# EAGLE board usbl (EAGLE 5.11)
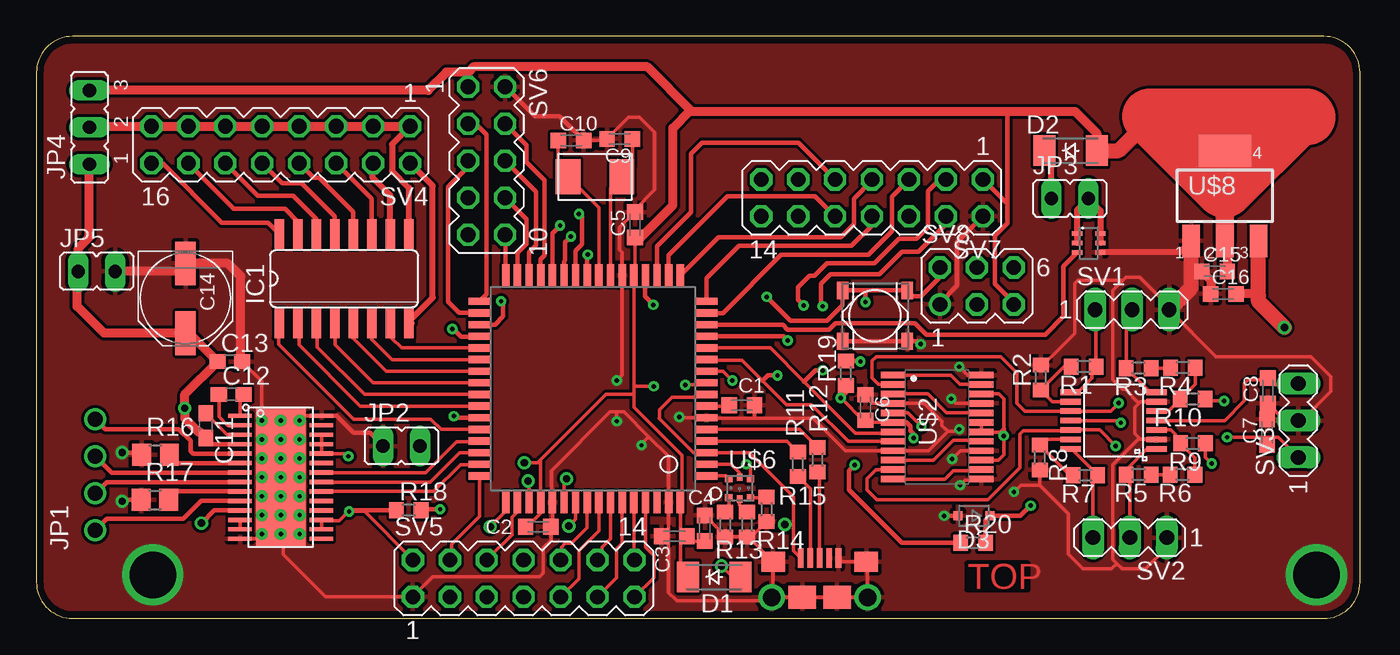
[diagram p0: board, top side]
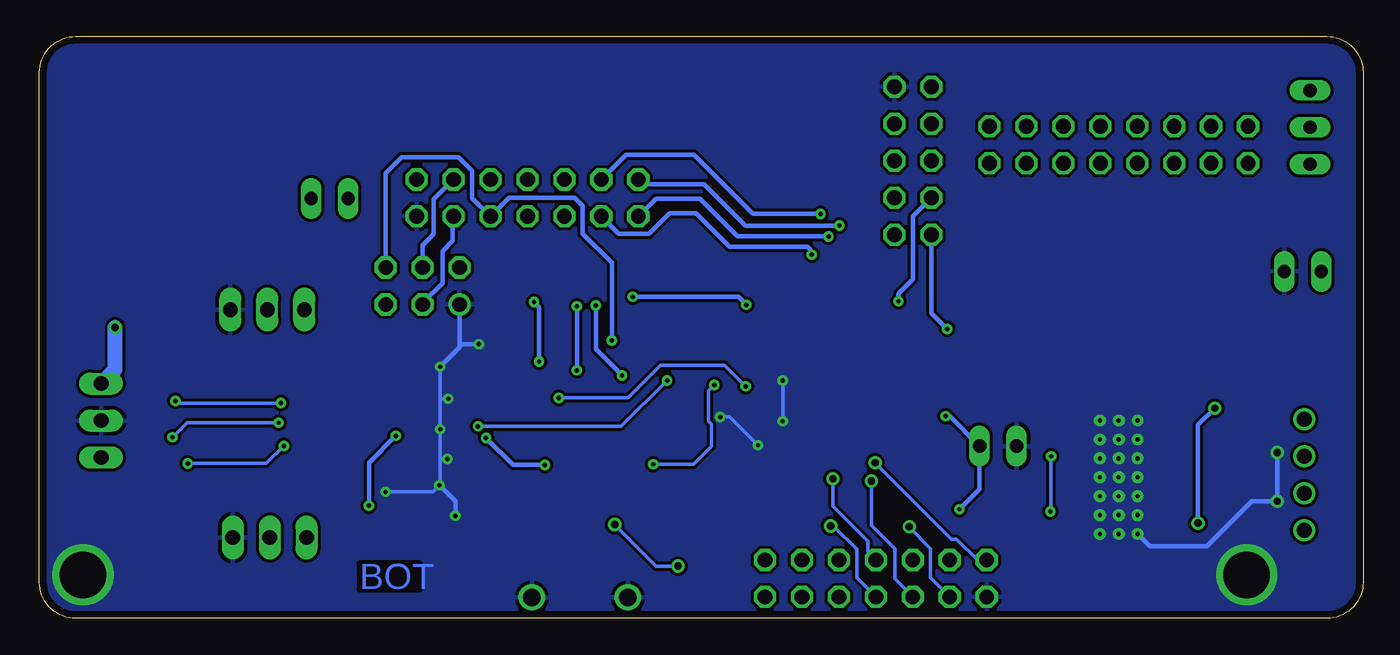
[diagram p1: board, bottom side, seen from below]

Size 91 x 40 mm. Coordinates in mm from the lower left corner, seen from the top.
Outline: 88.5,0 arc90 91,2.5 91,37.5 arc90 88.5,40 2.5,40 arc90 0,37.5 0,2.5 arc90 2.5,0 88.5,0
Copper layers (1*16): Top 0.035mm / dielectric 1.5mm / Bottom 0.035mm
Design rules "default *": minimum track width 10mil, minimum drill 0.3mm, track to track 8mil, track to pad 8mil, pad to pad 8mil, via to via 8mil, smd to smd 0mil, copper to edge 0.5mm, drill to drill 8mil, minimum pad ring 10mil, minimum via ring 8mil, stop-mask expansion 4mil, vias tented up to drill 0.6mm, thermal gap 10mil

## Footprints (pad centres in the part's own frame; a part is rotated, then mirrored left to right if it is on the bottom)
C0603K = smd 1.05 x 1.08: 1 -0.875,0; 2 0.875,0
C0603 = smd 1.1 x 1: 1 -0.85,0; 2 0.85,0
PANASONIC_D = smd 3 x 1.4: + 2.4,0; - -2.4,0
SOD-123_MINI-SMA = smd 1.5 x 2.1: A 1.8,0; C -1.8,0
SOD323-R = smd 0.6 x 0.6: A 1.1,0; C -1.1,0
SO16 = smd 0.66 x 2.032: 1 -4.445,-3.073; 2 -3.175,-3.073; 3 -1.905,-3.073; 4 -0.635,-3.073; 5 0.635,-3.073; 6 1.905,-3.073; 7 3.175,-3.073; 8 4.445,-3.073; 9 4.445,3.073; 10 3.175,3.073; 11 1.905,3.073; 12 0.635,3.073; 13 -0.635,3.073; 14 -1.905,3.073; 15 -3.175,3.073; 16 -4.445,3.073
1X04 = drill 1.016 round: 1 -2.54,0; 2 0,0; 3 2.54,0; 4 5.08,0
JP1 = drill 0.914 long: 1 0,-1.27; 2 0,1.27
JP2 = drill 0.914 long: 1 -2.54,0; 2 0,0; 3 2.54,0
R0603 = smd 1 x 1.1: 1 -0.85,0; 2 0.85,0
R0805 = smd 1.3 x 1.5: 1 -0.95,0; 2 0.95,0
MA03-1 = drill 1.016 long: 1 -2.54,0; 2 0,0; 3 2.54,0
MA08-2 = drill 1.016 octagon: 1 -8.89,-1.27; 2 -8.89,1.27; 3 -6.35,-1.27; 4 -6.35,1.27; 5 -3.81,-1.27; 6 -3.81,1.27; 7 -1.27,-1.27; 8 -1.27,1.27; 9 1.27,-1.27; 10 1.27,1.27; 11 3.81,-1.27; 12 3.81,1.27; 13 6.35,-1.27; 14 6.35,1.27; 15 8.89,-1.27; 16 8.89,1.27
MA07-2 = drill 1.016 octagon: 1 -7.62,-1.27; 2 -7.62,1.27; 3 -5.08,-1.27; 4 -5.08,1.27; 5 -2.54,-1.27; 6 -2.54,1.27; 7 0,-1.27; 8 0,1.27; 9 2.54,-1.27; 10 2.54,1.27; 11 5.08,-1.27; 12 5.08,1.27; 13 7.62,-1.27; 14 7.62,1.27
MA05-2 = drill 1.016 octagon: 1 -5.08,-1.27; 2 -5.08,1.27; 3 -2.54,-1.27; 4 -2.54,1.27; 5 0,-1.27; 6 0,1.27; 7 2.54,-1.27; 8 2.54,1.27; 9 5.08,-1.27; 10 5.08,1.27
MA03-2 = drill 1.016 round: 1 -2.54,-1.27 | drill 1.016 octagon: 2 -2.54,1.27; 3 0,-1.27; 4 0,1.27; 5 2.54,-1.27; 6 2.54,1.27
TQFP64 = smd 1.5 x 0.5: P$1 -7.8,6; P$2 -7.8,5.2; P$3 -7.8,4.4; P$4 -7.8,3.6; P$5 -7.8,2.8; P$6 -7.8,2; P$7 -7.8,1.2; P$8 -7.8,0.4; P$9 -7.8,-0.4; P$10 -7.8,-1.2; P$11 -7.8,-2; P$12 -7.8,-2.8; P$13 -7.8,-3.6; P$14 -7.8,-4.4; P$15 -7.8,-5.2; P$16 -7.8,-6; P$33 7.8,-6; P$34 7.8,-5.2; P$35 7.8,-4.4; P$36 7.8,-3.6; P$37 7.8,-2.8; P$38 7.8,-2; P$39 7.8,-1.2; P$40 7.8,-0.4; P$41 7.8,0.4; P$42 7.8,1.2; P$43 7.8,2; P$44 7.8,2.8; P$45 7.8,3.6; P$46 7.8,4.4; P$47 7.8,5.2; P$48 7.8,6 | smd 0.5 x 1.5: P$17 -6,-7.8; P$18 -5.2,-7.8; P$19 -4.4,-7.8; P$20 -3.6,-7.8; P$21 -2.8,-7.8; P$22 -2,-7.8; P$23 -1.2,-7.8; P$24 -0.4,-7.8; P$25 0.4,-7.8; P$26 1.2,-7.8; P$27 2,-7.8; P$28 2.8,-7.8; P$29 3.6,-7.8; P$30 4.4,-7.8; P$31 5.2,-7.8; P$32 6,-7.8; P$49 6,7.8; P$50 5.2,7.8; P$51 4.4,7.8; P$52 3.6,7.8; P$53 2.8,7.8; P$54 2,7.8; P$55 1.2,7.8; P$56 0.4,7.8; P$57 -0.4,7.8; P$58 -1.2,7.8; P$59 -2,7.8; P$60 -2.8,7.8; P$61 -3.6,7.8; P$62 -4.4,7.8; P$63 -5.2,7.8; P$64 -6,7.8
TSSOP24 = smd 1.635 x 0.44: P01 -3.05,3.575; P02 -3.05,2.925; P03 -3.05,2.275; P04 -3.05,1.625; P05 -3.05,0.975; P06 -3.05,0.325; P07 -3.05,-0.325; P08 -3.05,-0.975; P09 -3.05,-1.625; P10 -3.05,-2.275; P11 -3.05,-2.925; P12 -3.05,-3.575; P13 3.05,-3.575; P14 3.05,-2.925; P15 3.05,-2.275; P16 3.05,-1.625; P17 3.05,-0.975; P18 3.05,-0.325; P19 3.05,0.325; P20 3.05,0.975; P21 3.05,1.625; P22 3.05,2.275; P23 3.05,2.925; P24 3.05,3.575
TSSOP14 = smd 1.4 x 0.4: P$1 -2.95,1.95; P$2 -2.95,1.3; P$3 -2.95,0.65; P$4 -2.95,0; P$5 -2.95,-0.65; P$6 -2.95,-1.3; P$7 -2.95,-1.95; P$8 2.95,-1.95; P$9 2.95,-1.3; P$10 2.95,-0.65; P$11 2.95,0; P$12 2.95,0.65; P$13 2.95,1.3; P$14 2.95,1.95
TXC7A = smd 1.7 x 2.4: P$1 -1.85,0; P$2 1.85,0
MICROUSB = smd 1.6 x 1.4: GND1 -3.2,3.9; GND4 3.2,3.9 | smd 1.9 x 1.6: GND2 -1.2,1.45; GND3 1.2,1.45 | smd 0.4 x 1.35: P1 -1.3,4.15; P2 -0.65,4.15; P3 0,4.15; P4 0.65,4.15; P5 1.3,4.15 | drill 1.2 round: POST1 -3.3,1.45; POST2 3.3,1.45
OMRONLED = smd 0.5 x 0.5: P1 -0.75,-0.65; P3 0.75,-0.65; P4 0.75,0.65; P6 -0.75,0.65 | smd 0.4 x 0.5: P2 0,-0.75; P5 0,0.75
ETSSOP28 = smd 3.4 x 9.7: EPAD 0,0 | smd 1.6 x 0.3: P$1 -2.8,4.225; P$2 -2.8,3.575; P$3 -2.8,2.925; P$4 -2.8,2.275; P$5 -2.8,1.625; P$6 -2.8,0.975; P$7 -2.8,0.325; P$8 -2.8,-0.325; P$9 -2.8,-0.975; P$10 -2.8,-1.625; P$11 -2.8,-2.275; P$12 -2.8,-2.925; P$13 -2.8,-3.575; P$14 -2.8,-4.225; P$15 2.8,-4.225; P$16 2.8,-3.575; P$17 2.8,-2.925; P$18 2.8,-2.275; P$19 2.8,-1.625; P$20 2.8,-0.975; P$21 2.8,-0.325; P$22 2.8,0.325; P$23 2.8,0.975; P$24 2.8,1.625; P$25 2.8,2.275; P$26 2.8,2.925; P$27 2.8,3.575; P$28 2.8,4.225 | drill 0.3 pad 0.61 round: T0 -1.3,3.9; T1 0,3.9; T2 1.3,3.9; T3 -1.3,2.6; T4 0,2.6; T5 1.3,2.6; T6 -1.3,1.3; T7 0,1.3; T8 1.3,1.3; T9 -1.3,0; T10 0,0; T11 1.3,0; T12 -1.3,-1.3; T13 0,-1.3; T14 1.3,-1.3; T15 -1.3,-2.6; T16 0,-2.6; T17 1.3,-2.6; T18 -1.3,-3.9; T19 0,-3.9; T20 1.3,-3.9
SOT223 = smd 1.219 x 2.235: 1 -2.311,-3.099; 2 0,-3.099; 3 2.311,-3.099 | smd 3.6 x 2.2: 4 0,3.099
SOT363 = smd 0.7 x 0.3: P$1 -0.8,0.65; P$2 -0.8,0; P$3 -0.8,-0.65; P$4 0.8,-0.65; P$5 0.8,0; P$6 0.8,0.65
4PSWITCH = smd 0.8 x 1.2: P$1 -2.225,1.75; P$2 2.225,1.75; P$3 -2.225,-1.75; P$4 2.225,-1.75

## Placement (x,y rotation side)
C1  1u  [C0603K]  48.5,14.65 0 top
C2  0.1u  [C0603K]  34.5,6.3 180 top
C3  [C0603K]  43.85,5.65 0 top
C4  0.1u  [C0603K]  45.95,6.2 270 top
C5  0.1u  [C0603K]  41.15,27.05 90 top
C6  0.1u  [C0603K]  57,14.5 270 top
C7  [C0603K]  84.6,12.8 90 top
C8  [C0603K]  84.65,15.65 90 top
C9  20p  [C0603K]  40.1,32.95 180 top
C10  20p  [C0603K]  36.75,32.85 0 top
C11  0.1u  [C0603]  11.65,13.25 270 top
C12  0.01u  [C0603]  13.4,15.4 0 top
C13  0.1u  [C0603]  13.3,17.65 0 top
C14  [PANASONIC_D]  10.25,22 270 top
C15  10u  [C0603K]  81,23.85 0 top
C16  10u  [C0603K]  81.6,22.3 0 top
D1  CGRM4001-G  [SOD-123_MINI-SMA]  46.6,2.85 0 top
D2  CGRM4001-G  [SOD-123_MINI-SMA]  71.1,32.15 0 top
D3  [SOD323-R]  64.45,7.05 180 top
IC1  ULN2003AD  [SO16]  21.15,23.35 0 top
JP1  [1X04]  4.05,8.6 90 top
JP2  [JP1]  25.1,11.85 270 top
JP3  [JP1]  71.05,28.85 270 top
JP4  [JP2]  3.65,33.75 90 top
JP5  [JP1]  4.15,23.85 270 top
R1  43k  [R0603]  72,17.31 180 top
R2  100k  [R0603]  69.04,16.56 90 top
R3  100k  [R0603]  75.77,17.21 180 top
R4  43k  [R0603]  78.82,17.24 180 top
R5  100k  [R0603]  75.77,9.89 180 top
R6  43k  [R0603]  78.79,9.89 180 top
R7  43k  [R0603]  72.12,9.84 180 top
R8  100k  [R0603]  68.98,11.06 270 top
R9  100k  [R0603]  79.51,12.03 180 top
R10  100k  [R0603]  79.49,15.08 180 top
R11  22R  [R0603]  52.35,10.6 270 top
R12  22R  [R0603]  53.7,10.9 270 top
R13  43k  [R0603]  47.35,6.45 270 top
R14  43k  [R0603]  48.85,6.45 270 top
R15  43k  [R0603]  50.2,7.5 270 top
R16  [R0805]  8.2,11.25 0 top
R17  [R0805]  8.15,8.15 0 top
R18  43k  [R0603]  25.6,7.45 0 top
R19  100k  [R0603]  55.65,16.85 90 top
R20  100k  [R0603]  64.4,5.2 0 top
SV1  [MA03-1]  75.33,21.22 0 top
SV2  [MA03-1]  75.17,5.56 180 top
SV3  [MA03-1]  86.76,13.6 90 top
SV4  [MA08-2]  16.8,32.55 180 top
SV5  [MA07-2]  33.5,2.75 0 top
SV6  [MA05-2]  30.95,31.45 270 top
SV7  [MA07-2]  57.45,28.9 180 top
SV8  [MA03-2]  64.65,22.85 0 top
U$1  AT90USB1286  [TQFP64]  38.27,15.79 180 top
U$2  AD5206  [TSSOP24]  61.92,13.15 0 top
U$3  OPA4171  [TSSOP14]  74.06,13.6 180 top
U$4  TXC7A  [TXC7A]  38.4,30.35 0 top
U$5  MICROUSB  [MICROUSB]  53.85,0 0 top
U$6  OMRONLED  [OMRONLED]  48.35,8.95 180 top
U$7  DRV8825  [ETSSOP28]  16.8,9.7 0 top
U$8  VREG  [SOT223]  81.7,29.05 0 top
U$9  BSD816SN  [SOT363]  72.35,25.8 0 top
U$10  TL3315  [4PSWITCH]  57.65,20.8 0 top

## Library data of the parts
C1-C16 R1-R20 = rcl
D1-D3 = diode
IC1 = uln-udn
JP1 = RepRapjr
JP2-JP5 = jumper
SV1-SV8 = con-lstb; OC_FARNELL: unknown; OC_NEWARK: unknown
U$1-U$10 = untitled

## Nets
GND: C1.2 C2.1 C3.1 C4.1 C5.2 C6.1 C7.2 C8.1 C9.2 C10.2 C13.2 C14.- C15.1 C16.1 D3.A JP2.1 JP5.2 R2.2 R8.2 R13.2 R14.2 R15.2 R16.1 R17.1 SV1.3 SV2.1 SV3.2 SV5.1 SV6.2 SV7.2 SV8.1 U$1.P$6 U$1.P$22 U$1.P$53 U$1.P$63 U$2.P04 U$2.P09 U$2.P13 U$2.P16 U$2.P21 U$2.P24 U$3.P$2 U$3.P$6 U$5.GND1 U$5.GND2 U$5.GND3 U$5.GND4 U$5.P5 U$5.POST1 U$5.POST2 U$7.EPAD U$7.P$14 U$7.P$28 U$7.T0 U$7.T1 U$7.T2 U$7.T3 U$7.T4 U$7.T5 U$7.T6 U$7.T7 U$7.T8 U$7.T9 U$7.T10 U$7.T11 U$7.T12 U$7.T13 U$7.T14 U$7.T15 U$7.T16 U$7.T17 U$7.T18 U$7.T19 U$7.T20 U$8.1 U$9.P$4 U$10.P$3 U$10.P$4
N$1: U$2.P10 U$2.P17
N$2: U$2.P12 U$2.P14
N$3: D3.C R20.2 U$2.P15 U$2.P18 U$2.P19 U$2.P22
N$4: R11.1 U$1.P$4
N$5: U$2.P03 U$2.P20
N$6: U$2.P01 U$2.P23
N$7: R4.1 R10.2 U$3.P$5
N$8: R9.1 U$2.P11 U$3.P$12
N$9: R12.1 U$1.P$5
N$10: U$1.P$10 U$2.P05
N$11: SV7.4 SV8.3 U$1.P$12 U$2.P07
N$12: SV7.3 SV8.4 U$1.P$11 U$2.P08
N$13: R1.1 SV1.1 U$3.P$8
N$14: R1.2 R2.1 U$3.P$9
N$15: R3.2 SV1.2 U$3.P$7
N$16: R3.1 R4.2
N$17: R5.2 SV2.2 U$3.P$1
N$18: R5.1 R6.2
N$19: R7.1 SV2.3 U$3.P$14
N$20: R7.2 R8.1 U$3.P$13
N$21: R6.1 R9.2 U$3.P$3
N$22: R11.2 U$5.P2
N$23: R12.2 U$5.P3
N$24: D1.A U$1.P$3 U$1.P$8 U$5.P1
N$25: R10.1 U$2.P02 U$3.P$10
N$26: C2.2 C3.2 C4.2 C5.1 C6.2 C15.2 D1.C D2.A JP4.3 R18.1 R19.1 R20.1 SV5.2 SV6.1 SV7.1 SV8.5 U$1.P$21 U$1.P$52 U$1.P$64 U$2.P06 U$7.P$16 U$7.P$17 U$7.P$24 U$7.P$25 U$7.P$26 U$8.2 U$8.4
N$27: C1.1 U$1.P$7
N$28: U$1.P$9 U$6.P1
N$29: U$1.P$2 U$6.P2
N$30: U$1.P$1 U$6.P3
N$31: R13.1 U$6.P4
N$32: C7.1 SV3.1 U$3.P$11
N$33: C8.2 C16.2 SV3.3 U$3.P$4 U$8.3
N$34: R14.1 U$6.P5
N$35: R15.1 U$6.P6
N$36: SV5.13 U$1.P$61
N$37: C9.1 U$1.P$23 U$4.P$2
N$38: C10.1 U$1.P$24 U$4.P$1
N$39: SV5.14 U$1.P$60
N$40: SV5.11 U$1.P$59
N$41: SV5.12 U$1.P$58
N$42: SV5.10 U$1.P$56
N$43: SV5.9 U$1.P$57
N$44: SV5.7 U$1.P$55
N$45: SV5.8 U$1.P$54
N$46: SV5.5 U$1.P$51
N$47: SV5.6 U$1.P$50
N$48: SV5.3 U$1.P$49
N$49: SV5.4 U$1.P$48
N$50: C12.2 U$7.P$1
N$51: C12.1 U$7.P$2
N$52: U$7.P$12 U$7.P$13
N$53: JP1.3 U$7.P$7
N$54: U$1.P$47 U$7.P$20
N$55: U$1.P$46 U$7.P$21
N$56: U$1.P$45 U$7.P$22
N$57: R16.2 U$7.P$6
N$58: R17.2 U$7.P$9
N$59: C11.1 U$7.P$3
N$60: C11.2 C13.1 C14.+ JP4.1 JP5.1 U$7.P$4 U$7.P$11
N$61: JP1.2 U$7.P$8
N$62: JP1.4 U$7.P$5
N$63: JP1.1 U$7.P$10
N$64: IC1.1 U$1.P$44
N$65: IC1.2 U$1.P$42
N$66: IC1.3 U$1.P$41
N$67: IC1.4 U$1.P$40
N$68: IC1.5 U$1.P$39
N$69: IC1.6 U$1.P$38
N$70: IC1.7 U$1.P$37
N$71: IC1.9 JP4.2 SV4.1 SV4.3 SV4.5 SV4.7 SV4.9 SV4.11 SV4.13 SV4.15
N$72: IC1.10 SV4.4
N$73: IC1.11 SV4.6
N$74: IC1.12 SV4.8
N$75: IC1.13 SV4.10
N$76: IC1.14 SV4.12
N$77: IC1.15 SV4.14
N$78: IC1.16 SV4.16
N$79: IC1.8 SV4.2
N$80: JP2.2 R18.2 U$1.P$43
N$81: D2.C JP3.1
N$82: SV6.10 U$1.P$32
N$83: JP3.2 U$9.P$1 U$9.P$2 U$9.P$5 U$9.P$6
N$84: U$1.P$14 U$9.P$3
N$85: SV6.8 U$1.P$31
N$86: SV6.6 U$1.P$30
N$87: SV6.4 U$1.P$29
N$88: SV6.9 U$1.P$36
N$89: SV6.7 U$1.P$35
N$90: SV6.5 U$1.P$34
N$91: SV6.3 U$1.P$33
N$92: SV7.13 U$1.P$28
N$93: SV7.14 U$1.P$27
N$94: SV7.11 U$1.P$26
N$95: SV7.12 U$1.P$25
N$96: SV7.9 U$1.P$19
N$97: SV7.10 U$1.P$18
N$98: SV7.7 U$1.P$17
N$99: SV7.8 U$1.P$16
N$100: SV7.5 U$1.P$15
N$101: SV7.6 SV8.6 U$1.P$13
N$103: R19.2 SV8.2 U$1.P$20 U$10.P$1 U$10.P$2

## Tracks (layer width: path | path; a pad name or v marks a point on that pad's centre or on a via)
GND  (via drill 0.3, 0.5, 3.2)
  Top 0.254: U$3.P$2 75.9,12.3 75.83,12.38 | 75.83,12.38 75.5,12.7 75.5,14.5 75.8,14.8 | U$3.P$6 75.9,14.9 75.8,14.8 | 74.7,23.25 74,22.55 74,16.4 74.65,15.75 74.85,15.75 75.8,14.8 | SV2.1 77.71,4.86 76.25,3.4 74.65,3.4 74.28,3.77 | 74.28,3.77 74,4.05 74,10.55 75.83,12.38 | U$2.P24 64.03,16.73 v63.45,17.3 | v63.5,9.15 63.85,9.5 64.89,9.5 U$2.P13 | 62.65,12.85 61.33,11.53 U$2.P09 55.62,11.53 53.4,13.75 49.35,13.75 | 62.65,12.85 63.4,12.85 63.45,12.9 v63.45,13 | U$2.P16 63.52,11.53 v62.95,10.95 | U$2.P21 63.23,14.78 v62.9,15.1 | 62.65,12.85 62.25,13.25 62.25,13.55 61.02,14.78 U$2.P04 58.84,14.8 57.45,14.8 57.45,14.93 C6.1 | 68.98,9.17 R8.2 | 68.98,9.17 70.95,7.2 70.95,4.4 71.95,3.4 73.9,3.4 74.28,3.77 | R2.2 69.21,17.41 71.4,19.6 71.4,23.05 71.6,23.25 74.7,23.25 | 74.7,23.25 74.9,23.45 75.85,23.45 77.87,21.43 SV1.3 81.09,18 87.6,18 89,16.6 89,15.6 87,13.6 SV3.2 85.83,13.6 C8.1 84.6,14.72 C7.2 | 68.98,9.17 67.67,9.17 v67.2,8.7 | 42.1,12.5 40.4,14.2 39.9,14.2 | 42.1,12.5 43.47,11.13 U$1.P$63 43.47,5.65 | 39.9,14.2 39.45,14.2 35.4,10.15 35.4,8.06 U$1.P$53 35.47,6.29 C2.1 35.38,5.38 34.85,4.85 34.85,3.1 34.6,2.85 27.25,2.85 SV5.1 19.87,1.48 16.95,4.4 16.95,5.65 U$7.T19 | 50.17,1.07 U$5.POST1 | 50.17,1.07 50.05,0.95 | U$5.POST1 50.65,1.55 U$5.GND1 48.95,5.6 R14.2 | U$5.POST1 U$5.GND2 U$5.GND3 U$5.POST2 57.15,3.8 U$5.GND4 55.4,3.9 U$5.P5 | v44.2,13.85 44.26,13.79 U$1.P$6 46.11,13.75 49.35,13.75 | v41.6,11.9 41.6,12 42.1,12.5 | 43.47,5.65 43.47,5.25 | 43.47,5.25 43.42,5.3 | 47.65,6 47.4,6 47.02,6 C4.1 | C1.2 49.38,13.78 49.35,13.75 | C10.2 39.12,32.85 C9.2 40.73,34.45 41.45,34.45 42.5,33.4 42.5,29.45 41.15,28.1 C5.2 40.1,26.88 40.1,25.35 40.27,25.18 U$1.P$22 40.27,16.72 v39.9,16.35
  Top 0.254: 43.47,5.65 C3.1 | R14.2 R13.2 | R14.2 49.15,5.6 R15.2 | 43.47,5.25 43.47,1.78 44.05,1.2 50.05,1.2 50.17,1.07 | 39.9,14.2 v39.9,13.55 | U$7.P$14 15.18,5.47 U$7.T18 U$7.T15 U$7.T12 U$7.T9 U$7.T6 U$7.T3 U$7.T0 | U$7.T0 U$7.T1 U$7.T2 | U$7.T5 U$7.T4 | U$7.T7 U$7.EPAD U$7.T13 U$7.T16 U$7.T19 | U$7.T19 U$7.T20 U$7.T17 U$7.T14 U$7.T11 U$7.T8 U$7.T5 | U$7.P$28 18.43,13.93 U$7.T2 | U$7.T2 U$7.T5 | U$7.T0 15.5,16.3 C13.2
  Top 0.305: R17.1 6,8.15 v5.9,8.05 | v5.9,11.4 7.1,11.4 R16.1 | R13.2 47.35,5.95 47.4,6 | U$7.P$28 20.62,13.93 21.8,12.75 22.93,12.75 JP2.1 | SV6.2 32.27,36.53 34.3,34.5 35.98,34.5 C10.2 | SV8.1 62.11,21.66 63.3,22.85 63.3,25.86 SV7.2 | U$10.P$3 U$10.P$4 60.6,19.05 v60.8,18.85 | v62.4,7.05 D3.A
  Top 0.406: U$9.P$4 78.59,25.15 U$8.1
  Top 0.61: 79.39,23.75 79.49,23.85 C15.1 80.72,23.25 C16.1 | C13.2 14.05,17.75 14.05,23.5 13.15,24.4 C14.- 9.7,23.85 JP5.2
  Top 1.016: U$8.1 79.39,23.75 79.39,22.74 SV1.3
  Bottom 0.254: v63.45,13 63.45,10.95 | 63.45,10.95 63.45,9.2 v63.5,9.15 63.95,8.7 v67.2,8.7 | v63.45,13 63.45,14.95 | 63.45,14.95 v63.45,17.3 | v63.45,13 63.45,12.95 | 63.45,10.95 v62.95,10.95 | v62.9,15.1 63.3,15.1 63.45,14.95 | v44.2,13.85 43.55,13.85 v41.6,11.9 | v39.9,16.35 v39.9,13.55 39.9,13.4
  Bottom 0.305: v5.9,11.4 v5.9,8.05 7.65,8.05 10.75,4.95 14.65,4.95 U$7.T18 | 62.11,18.8 62.11,18.64 v63.45,17.3 | 62.11,18.8 SV8.1 | v60.8,18.85 62.06,18.85 62.11,18.8 | v62.4,7.05 62.4,8.05 v63.5,9.15
  other vias: 8,3 88,3
  pour Top: -1,40.6 103.3,40.6 103.3,-2.45 -5.85,-1.45 -3.85,36.85
  pour Bottom: -1.85,43.15 105.3,43.15 105.3,-2.45 -10,-2.45 -10,37
N$1
  Top 0.254: U$2.P10 61.67,10.88 63.05,12.25 64.89,12.25 U$2.P17
N$2
  Top 0.254: U$2.P12 62.48,9.57 63.05,10.15 64.89,10.15 U$2.P14
N$3  (via drill 0.3)
  Top 0.254: U$2.P15 66.12,10.88 66.5,11.25 v66.5,12.55 66.25,12.8 | 66.25,12.8 65,12.8 U$2.P18 U$2.P19 | U$2.P22 66.17,15.43 66.5,15.1 66.5,13.05 66.25,12.8
  Top 0.305: v68.35,7.75 67.65,7.05 D3.C 65.25,6.75 R20.2 | v66.5,12.55 66.5,13.05
  Bottom 0.305: v68.35,7.75 68.35,10.7 v66.5,12.55
N$4
  Top 0.254: U$1.P$4 51.61,12.19 R11.1
N$5
  Top 0.254: U$2.P03 61.27,15.43 62.55,14.15 64.94,14.15 U$2.P20
N$6
  Top 0.254: U$2.P01 62.88,16.73 63.5,16.1 64.94,16.1 U$2.P23
N$7
  Top 0.254: R4.1 79.67,16.11 R10.2 77.81,14.25 U$3.P$5
N$8  (via drill 0.3)
  Top 0.254: R9.1 80.36,11.09 v80.8,10.65 | v74.2,11.85 73.1,12.95 U$3.P$12 71.06,12.9 67.85,12.9 67.6,12.65 67.6,10.35 65.4,8.15 57.8,8.15 57.1,8.85 57.1,9.6 57.73,10.22 U$2.P11
  Bottom 0.254: v80.8,10.65 75.4,10.65 v74.2,11.85
N$9
  Top 0.254: U$1.P$5 52.46,12.99 R12.1
N$10  (via drill 0.3)
  Top 0.254: U$2.P05 59.92,14.12 v60.85,13.2 | v47.85,16.35 47.21,16.99 U$1.P$10
  Bottom 0.254: v60.85,13.2 51,13.2 v47.85,16.35
N$11  (via drill 0.3)
  Top 0.254: U$2.P07 58.78,12.74 56.31,12.74 52.77,16.27 50.45,18.6 U$1.P$12
  Top 0.305: SV7.4 62.53,27.08 60.65,25.2 59.5,25.2 57.95,23.65 54.6,23.65 53.95,23 53.95,21.55 v54.05,21.45 | v54.05,17.05 53.55,17.05 52.77,16.27
  Bottom 0.305: v54.05,17.05 v54.05,21.45 | SV8.3 64.65,21.7 63.3,23.05 63.3,25.25 62.6,25.95 62.6,27.56 SV7.4
N$12  (via drill 0.3)
  Top 0.254: U$1.P$11 46.11,17.75 48.5,17.75 49.92,16.32 51.55,14.7 53.3,14.7 55.83,12.18 U$2.P08
  Top 0.305: SV7.3 62.12,30.17 61.3,29.35 61.3,26.9 60.5,26.1 59.3,26.1 57.6,24.4 54.35,24.4 53.5,23.55 53.15,23.55 52.35,22.75 52.35,21.9 v52.75,21.5 | v50.95,16.7 50.3,16.7 49.92,16.32
  Bottom 0.305: v52.75,21.5 52.75,18.5 v50.95,16.7 | SV8.4 64.65,25.65 63.9,26.4 63.9,28.8 SV7.3
N$13
  Top 0.254: U$3.P$8 71.6,15.55 72.55,16.5 72.55,17.01 R1.1 72.85,21.16 SV1.1
N$14
  Top 0.254: R1.2 70.64,17.31 R2.1 69.85,14.9 U$3.P$9
N$15
  Top 0.254: U$3.P$7 76.58,15.55 R3.2 74.92,20.81 SV1.2
N$16
  Top 0.254: R3.1 77.94,17.21 R4.2
N$17
  Top 0.254: 76.58,11.65 U$3.P$1 76.35,11.65 74.92,10.22 R5.2 75.17,9.64 SV2.2
N$18
  Top 0.254: R6.2 R5.1
N$19
  Top 0.254: U$3.P$14 71.16,11.65 72.63,10.18 | 72.63,10.18 R7.1 | SV2.3 72.63,10.18
N$20
  Top 0.254: U$3.P$13 69.37,12.3 R8.1 71.05,9.84 R7.2
N$21
  Top 0.254: U$3.P$3 78,12.95 78.66,12.29 R9.2 79.64,11.05 R6.1
N$22
  Top 0.254: U$5.P2 53.2,8.9 R11.2
N$23
  Top 0.254: U$5.P3 53.85,9.9 R12.2
N$24  (via drill 0.5)
  Top 0.254: 52.05,6.4 52.05,4.65 U$5.P1 | 52.05,6.4 52.05,8.35 49.01,11.39 U$1.P$3 45.16,11.39 42.8,13.75 42.85,13.75 42.85,14.35 43.7,15.2 45.2,15.2 45.4,15.4 U$1.P$8 | v51.45,6.45 52,6.45 52.05,6.4 | D1.A 47.85,2.85 v47.1,3.6
  Bottom 0.254: v47.1,3.6 48.6,3.6 v51.45,6.45
N$25  (via drill 0.3)
  Top 0.254: v74.4,14.8 73.85,14.25 U$3.P$10 67.95,14.25 67.4,14.8 67.4,16.9 66.3,18 57.75,18 57.45,17.7 57.45,16.55 57.9,16.1 58.84,16.1 U$2.P02 | v81.65,14.95 80.47,14.95 R10.1
  Bottom 0.254: v74.4,14.8 81.5,14.8 v81.65,14.95
N$26  (via drill 0.3, 0.5)
  Top 0.254: 41.07,15.5 41.07,14.53 44.4,11.2 44.4,8.12 U$1.P$64 44.27,5.7 | 41.07,15.5 41.07,16.05 | 41.07,16.05 U$1.P$21 41.15,23.67 C5.1 | 34.67,10.92 U$1.P$52 34.67,7.25 33.73,6.3 C2.2 | 34.67,10.92 39.15,15.4 40.97,15.4 41.07,15.5 | 44.27,5.7 44.27,5.25 | 56.85,13.47 U$2.P06 | 56.85,13.47 C6.2 | C4.2 45.92,5.3 45.08,5.3 C3.2 44.32,5.65 44.27,5.7 | 44.27,5.25 44.32,5.3 | v33.55,10.7 34.45,10.7 34.67,10.92 | 56.85,13.47 56.85,13.6 v55.3,15.15 | v42.45,15.95 41.17,15.95 41.07,16.05 | 44.27,5.25 44.27,3.38 D1.C | U$7.P$26 U$7.P$25 U$7.P$24 21.27,11.32 v21.45,11.15 | U$7.P$16 U$7.P$17 19.68,6.7 20.8,6.7 21.45,7.35 v21.5,7.35 22.55,7.35 SV5.2
  Top 0.305: R18.1 21.6,7.45 v21.5,7.35 | SV6.1 29.68,37.52 29.65,37.55 | SV8.5 67.19,21.71 65.9,23 65.9,26.3 66.75,27.15 66.75,28.49 | 66.75,28.49 SV7.1 | R19.1 55.65,15.5 v55.3,15.15 | 66.75,28.49 66.75,34.75 66.65,34.85 | R20.1 59.5,5.2 55.85,8.85 55.85,10.15 v56.25,10.55 | v60.3,12.4 60.3,12.7 60.1,12.9 60.1,13.2 59.83,13.47 U$2.P06
  Top 0.61: D2.A 72.9,33.35 71.4,34.85 66.65,34.85 45.05,34.85 | 45.05,34.85 44.9,34.85 43.75,33.7 43.75,28.4 41.52,26.18 C5.1 | C15.2 81.88,25.78 U$8.2 | JP4.3 26.94,36.29 28.2,37.55 29.65,37.55 29.7,37.55 30.05,37.9 42,37.9 45.05,34.85
  Top 1.016: D2.A 74.4,32.15 76.65,34.4
  Top 1.27: U$8.2 81.7,29.4 81.65,29.45
  Top 3.81: 81.65,29.45 81.6,29.45 76.65,34.4 76.55,34.5 87.35,34.5 87.4,34.45 86.75,34.45 81.75,29.45 81.7,29.5 U$8.4
  Bottom 0.254: SV5.2 26.52,4.02 27.95,5.45 28.3,5.45 v33.55,10.7 | v55.3,15.15 50.55,15.15 48.3,17.4 43.9,17.4 v42.45,15.95 | v21.45,11.15 21.45,7.4 v21.5,7.35
  Bottom 0.305: v56.25,10.55 58.45,10.55 v60.3,12.4
N$27
  Top 0.254: U$1.P$7 47.56,14.59 C1.1
N$28  (via drill 0.3)
  Top 0.254: v44.6,16.05 45.93,16.05 U$1.P$9 | U$6.P1 49.1,10.3 v48.8,10.6
  Bottom 0.254: v48.8,10.6 46.05,10.6 44.8,11.85 44.8,13.35 45,13.55 45,15.65 v44.6,16.05
N$29
  Top 0.254: U$1.P$2 47.76,10.59 48.35,10 U$6.P2
N$30
  Top 0.254: U$1.P$1 47.41,9.79 U$6.P3
N$31
  Top 0.254: U$6.P4 47.6,7.55 R13.1
N$32  (via drill 0.3)
  Top 0.254: SV3.1 85.37,12.45 84.6,12.45 | v81.85,12.45 84.6,12.45 | v74.55,13.45 74.4,13.6 U$3.P$11 | 84.6,12.45 C7.1
  Bottom 0.254: v81.85,12.45 80.85,13.45 v74.55,13.45
N$33  (via drill 0.5)
  Top 0.254: SV3.3 86.67,16.05 85.12,16.05 C8.2 84.53,16.4 83.3,16.4 83.05,16.15 83.05,14.95 81.7,13.6 U$3.P$4
  Top 0.61: C16.2 83.91,22.3 84.01,22.2
  Top 1.016: U$8.3 84.01,22.2 84.01,21.79 v85.8,20
  Bottom 1.016: v85.8,20 85.8,17.1 SV3.3
N$34
  Top 0.254: U$6.P5 48.35,7.8 R14.1
N$35
  Top 0.254: U$6.P6 50.45,8.3
  Top 0.305: R15.1 50.4,8.35 50.45,8.3
N$36
  Top 0.254: U$1.P$61 41.87,4.88 42.45,4.3 42.45,2.81 SV5.13
N$37
  Top 0.254: U$1.P$23 39.47,29.57 U$4.P$2 40.98,31.07 C9.1
N$38
  Top 0.254: U$1.P$24 38.67,28.23 U$4.P$1 35.88,31.02 C10.1
N$39
  Top 0.254: U$1.P$60 41.07,4.07 SV5.14
N$40
  Top 0.254: U$1.P$59 40.27,5.17 39.9,4.8 39.9,2.8 SV5.11
N$41
  Top 0.254: U$1.P$58 39.47,5.47 38.9,4.9 38.9,4.34 SV5.12
N$42
  Top 0.254: U$1.P$56 37.87,6.22 36.8,5.15 36.35,5.15 36.1,4.9 36.1,4.08 SV5.10
N$43
  Top 0.254: U$1.P$57 38.67,6.02 37.3,4.65 37.3,2.74 SV5.9
N$44  (via drill 0.5)
  Top 0.254: U$1.P$55 37.07,6.82 v36.6,6.35
  Bottom 0.254: v36.6,6.35 36.4,6.35 34.8,4.75 34.8,2.78 SV5.7
N$45  (via drill 0.5)
  Top 0.254: U$1.P$54 36.27,9.42 v36.45,9.6
  Bottom 0.254: v36.45,9.6 36.45,7.7 34.05,5.3 34.05,4.57 SV5.8
N$46  (via drill 0.5)
  Top 0.254: U$1.P$51 33.87,9.38 v33.8,9.45
  Bottom 0.254: v33.8,9.45 33.8,6.4 32.2,4.8 32.2,2.72 SV5.5
N$47
  Top 0.254: U$1.P$50 33.07,7.32 32.7,6.95 32.7,5.76 SV5.6
N$48  (via drill 0.5)
  Top 0.254: U$1.P$49 32.2,7.92 32.2,7.3 v31.2,6.3
  Bottom 0.254: v31.2,6.3 31.2,6.25 29.75,4.8 29.75,2.81 SV5.3
N$49
  Top 0.254: U$1.P$48 30.47,7.02 28.55,5.1 28.55,4.15 SV5.4
N$50
  Top 0.254: U$7.P$1 14,15.15 C12.2
N$51
  Top 0.254: U$7.P$2 13.12,13.28 12.55,13.85 C12.1
N$52
  Top 0.254: U$7.P$13 U$7.P$12
N$53
  Top 0.305: U$7.P$7 5.17,10.03 JP1.3
N$54
  Top 0.254: U$7.P$20 27.32,8.72 29.15,10.55 30.43,10.55 U$1.P$47
N$55
  Top 0.254: U$7.P$21 27.07,9.38 29.1,11.4 U$1.P$46
N$56
  Top 0.254: U$7.P$22 26.77,10.03 28.9,12.15 30.43,12.15 U$1.P$45
N$57
  Top 0.254: R16.2 9.72,10.68
  Top 0.305: 9.72,10.68 U$7.P$6
N$58
  Top 0.254: R17.2 9.68,8.72
  Top 0.305: 9.68,8.72 U$7.P$9
N$59
  Top 0.254: U$7.P$3 13.12,12.62 C11.1
N$60  (via drill 0.5)
  Top 0.254: C11.2 12.07,11.97
  Top 0.305: 12.07,11.97 U$7.P$4 | U$7.P$11 12.22,7.42 v11.35,6.55
  Top 0.61: C11.2 11.25,12.8 11.15,12.8 10.2,13.75 v10.2,14.45 10.2,15.4 C13.1 10.5,19.6 C14.+ 4.65,19.6 2.8,21.45 2.8,23.77 JP5.1 2.88,25.43 3.65,26.2 JP4.1
  Bottom 0.305: v11.35,6.55 11.35,13.3 v10.2,14.45
N$61
  Top 0.305: U$7.P$8 4.83,9.38 JP1.2
N$62
  Top 0.254: 4.13,13.6 JP1.4 4.28,13.45
  Top 0.305: JP1.4 4.73,13 9.8,13 10.6,12.2 10.6,11.5 10.78,11.32 U$7.P$5
N$63
  Top 0.305: U$7.P$10 11.32,8.07 10.1,6.85 4.84,6.85 JP1.1
N$64
  Top 0.254: U$1.P$44 27.81,12.99 27.1,13.7 21.8,13.7 16.65,18.85 16.65,20.22 IC1.1
N$65
  Top 0.254: U$1.P$42 22.26,14.59 18.05,18.8 18.05,20.2 IC1.2
N$66
  Top 0.254: U$1.P$41 22.56,15.39 19.3,18.65 19.3,20.22 IC1.3
N$67
  Top 0.254: U$1.P$40 23.16,16.19 20.55,18.8 20.55,20.24 IC1.4
N$68
  Top 0.254: U$1.P$39 24.06,16.99 21.75,19.3 21.75,20.24 IC1.5
N$69
  Top 0.254: U$1.P$38 24.46,17.79 23.05,19.2 IC1.6
N$70
  Top 0.254: U$1.P$37 25.11,18.59 24.4,19.3 24.4,20.2 IC1.7
N$71
  Top 0.406: IC1.9 25.59,29.61 24.45,30.75 24.45,32.58 SV4.1
  Top 0.61: SV4.1 SV4.3 SV4.5 SV4.7 SV4.9 SV4.11 SV4.13 SV4.15 3.72,33.82 JP4.2
N$72
  Top 0.406: IC1.10 24.32,29.07 23.1,30.3 23.1,31.23 SV4.4
N$73
  Top 0.305: IC1.11 23.05,28.84 SV4.6
N$74
  Top 0.305: IC1.12 21.79,27.96 19.45,30.3 19.05,30.3 SV4.8
N$75
  Top 0.305: IC1.13 20.52,27.64 18.25,29.9 16.91,29.9 SV4.10
N$76
  Top 0.305: IC1.14 19.25,27.45 17.65,29.05 15.22,29.05 SV4.12
N$77
  Top 0.305: IC1.15 17.98,27.27 17.1,28.15 13.58,28.15 SV4.14
N$78
  Top 0.305: SV4.16 8.67,31.28 12.75,27.2 15.93,27.2 IC1.16
N$79
  Top 0.305: IC1.8 25.88,20.28
  Top 0.406: IC1.8 25.59,20.39 27.25,22.05 27.25,29.72 SV4.2
N$80  (via drill 0.3)
  Top 0.305: U$1.P$43 28.81,13.79 v28.7,13.9 | v27.75,7.5 26.5,7.5 R18.2
  Bottom 0.305: v28.7,13.9 28.42,13.9 JP2.2 26.37,8.88 v27.75,7.5
N$81
  Top 0.406: JP3.1 69.78,31.67 D2.C
N$82
  Top 0.305: U$1.P$32 32.27,26.32 SV6.10
N$83
  Top 0.406: U$9.P$1 U$9.P$2 71.55,28.08 JP3.2 73.15,28.02 U$9.P$5 U$9.P$6
N$84
  Top 0.305: U$1.P$14 51.31,20.19 51.65,19.85 54.5,19.85 54.95,20.3 60.4,20.3 61.2,19.5 69.35,19.5 70.6,20.75 70.6,24.2 U$9.P$3
N$85
  Top 0.305: U$1.P$31 33.07,25.12 33.7,25.75 33.7,27.43 SV6.8
N$86
  Top 0.305: U$1.P$30 33.87,25.17 34.35,25.65 34.35,29.32 SV6.6
N$87
  Top 0.305: U$1.P$29 34.67,24.67 34.95,24.95 34.95,30.1 33.7,31.35 33.7,32.51 SV6.4
N$88  (via drill 0.3)
  Top 0.305: v28.6,19.9 28.65,19.9 29.2,19.35 30.43,19.35 U$1.P$36
  Bottom 0.305: SV6.9 29.68,20.98 v28.6,19.9
N$89  (via drill 0.3)
  Top 0.305: U$1.P$35 31.54,20.19 32.1,20.75 32.1,21.65 v31.95,21.8
  Bottom 0.305: v31.95,21.8 31.95,22.3 30.95,23.3 30.95,27.64 SV6.7
N$90
  Top 0.305: SV6.5 29.68,31.03 28.3,29.65 28.3,21.75 29.05,21 U$1.P$34
N$91
  Top 0.305: SV6.3 30.21,33.99 30.95,33.25 30.95,22.27 U$1.P$33
N$92  (via drill 0.3)
  Top 0.305: U$1.P$28 35.47,26.47 v36,27
  Bottom 0.305: v36,27 42.45,27 45.3,29.85 49.51,29.85 SV7.13
N$93  (via drill 0.3)
  Top 0.305: U$1.P$27 36.27,24.52 36.35,24.6 36.35,25.85 v36.75,26.25
  Bottom 0.305: v36.75,26.25 43,26.25 45.6,28.85 48.61,28.85 SV7.14
N$94  (via drill 0.3)
  Top 0.305: v37.3,27.8 37.5,27.6 37.5,25.7 37.07,25.27 U$1.P$26
  Bottom 0.305: v37.3,27.8 41.95,27.8 46,31.85 50.69,31.85 SV7.11
N$95  (via drill 0.3)
  Top 0.305: U$1.P$25 37.87,24.97 v37.9,25
  Bottom 0.305: SV7.12 51.19,26.45 49.1,26.45 47.7,27.85 45.85,27.85 43.55,25.55 38.2,25.55 38,25.35 38,25.1 v37.9,25
N$96
  Top 0.305: U$1.P$19 42.67,25.57 45,27.9 45,31.95 45.75,32.7 52.38,32.7 SV7.9
N$97
  Top 0.305: U$1.P$18 43.47,24.97 47.5,29 53.54,29 SV7.10
N$98
  Top 0.305: SV7.7 57.45,30.1 56.2,28.85 56.2,27.1 55.3,26.2 46.88,26.2 U$1.P$17
N$99
  Top 0.305: U$1.P$16 46.07,23.37 48.3,25.6 56.05,25.6 57.45,27 SV7.8
N$100
  Top 0.305: U$1.P$15 47.19,20.99 51.2,25 57.2,25 58.8,26.6 58.8,28.98 SV7.5
N$101  (via drill 0.3)
  Top 0.305: U$1.P$13 51.36,19.39 v51.65,19.1
  Bottom 0.305: v51.65,19.1 51.65,24.45 53.65,26.45 53.65,28.35 54.2,28.9 58.72,28.9 SV7.6 61.25,28.89 61.25,30.75 62.2,31.7 66.1,31.7 67.19,30.61 SV8.6
N$103  (via drill 0.3)
  Top 0.305: SV8.2 62.11,23.46 60.8,22.15 60.27,22.15 U$10.P$2 57,22.55 | 57,22.55 U$10.P$1 55.42,21.52 54.35,20.45 51.85,20.45 v50.2,22.1 | v42.4,21.55 42.4,21.6 41.85,22.15 41.85,23.57 U$1.P$20 | 56.5,17.8 v56.65,17.65 56.6,17.7 R19.2 | 57,22.55 v57,21.75
  Bottom 0.305: v50.2,22.1 42.95,22.1 v42.4,21.55 | v56.65,17.65 56.65,21.4 v57,21.75

## Text on the board
Top: TOP
Bottom: BOT